# EAGLE board RFMDisplay (EAGLE 6.5.0)
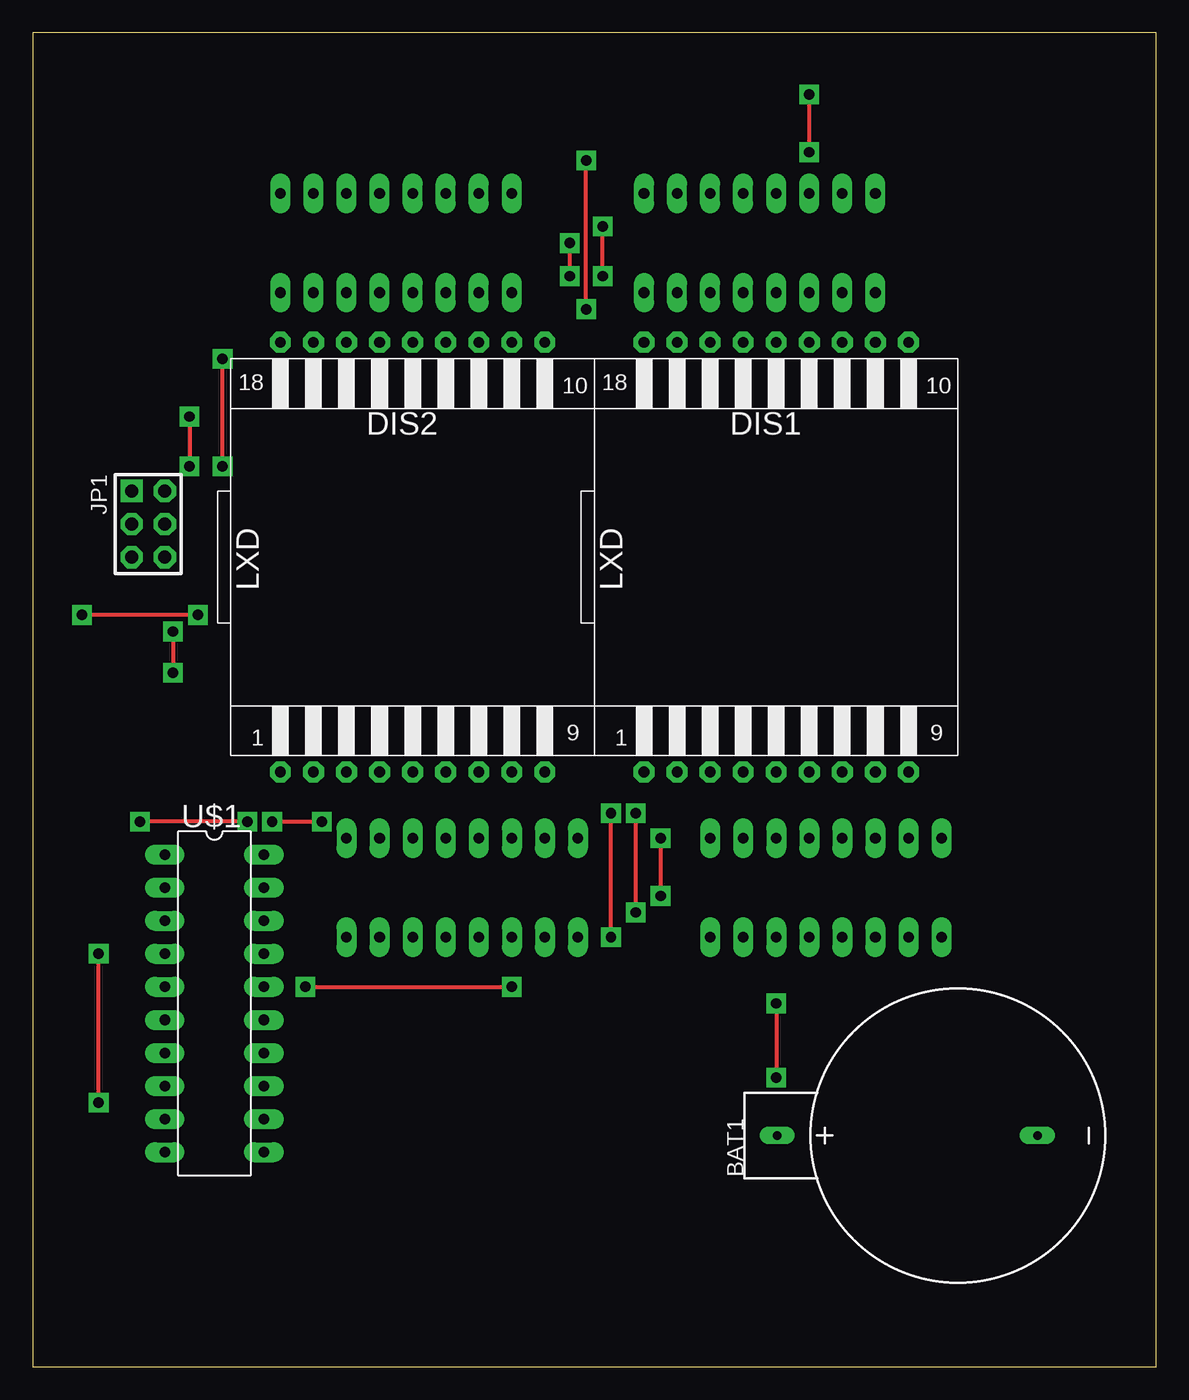
[diagram p0: board, top side]
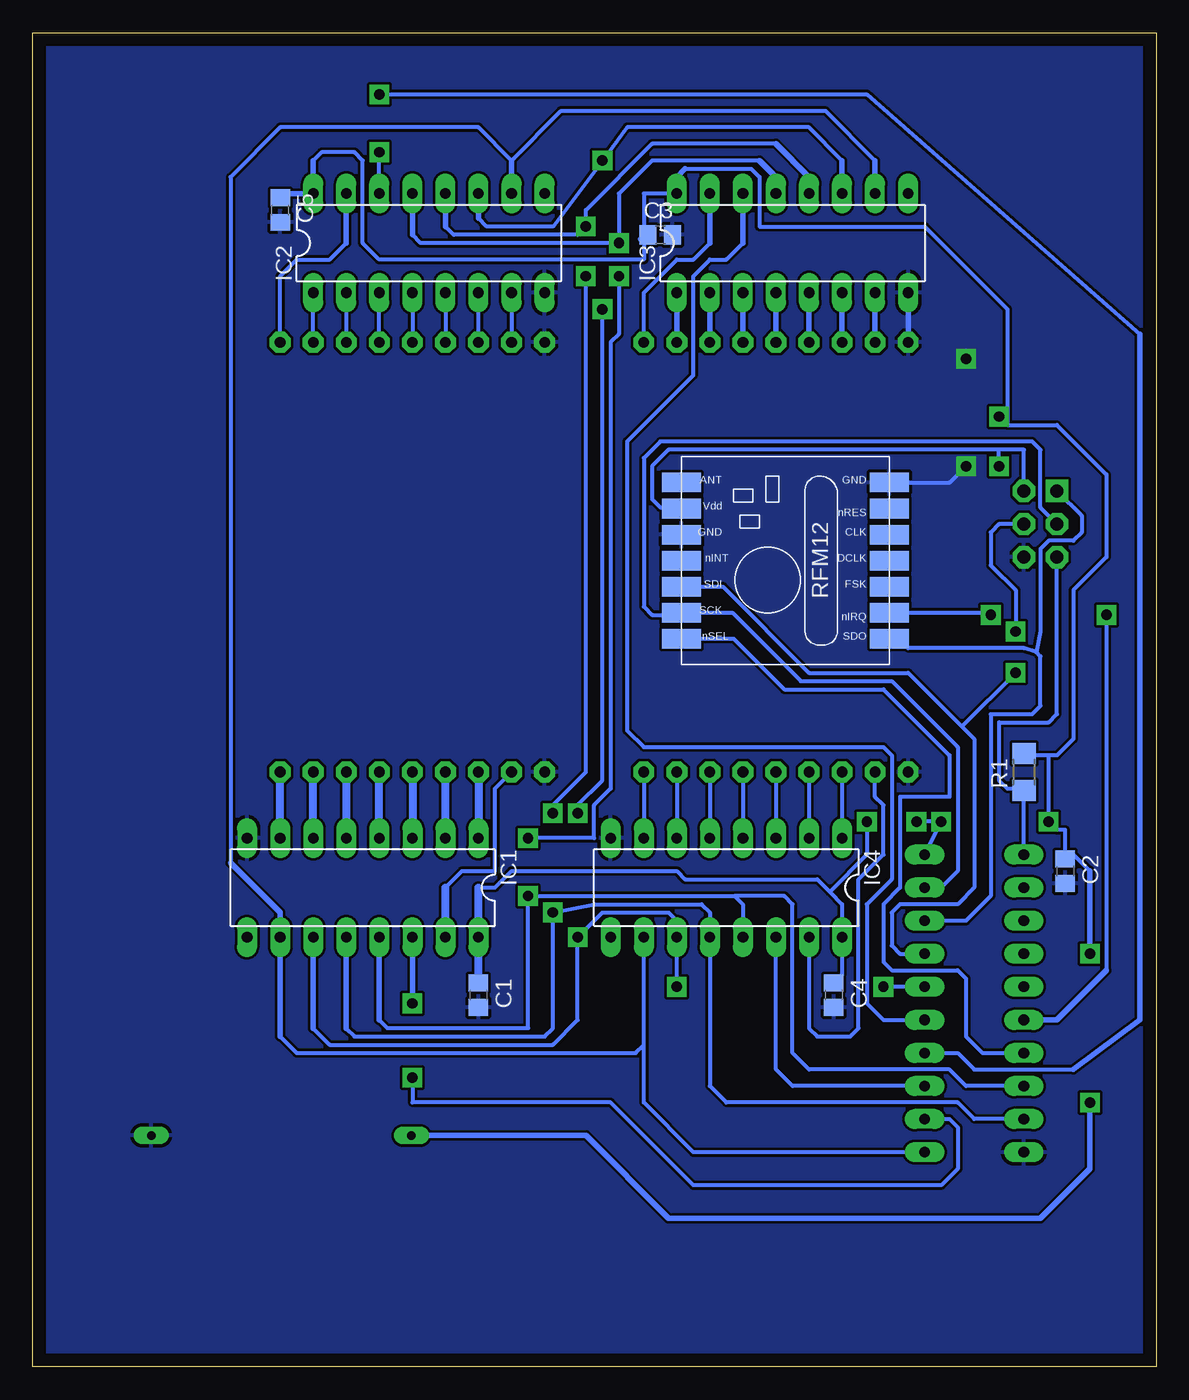
[diagram p1: board, bottom side, seen from below]

Size 86.34 x 102.54 mm. Coordinates in mm from the lower left corner, seen from the top.
Outline: 0,0 86.34,0 86.34,102.54 0,102.54 0,0
Copper layers (1*16): Top 0.035mm / dielectric 1.5mm / Bottom 0.035mm
Design rules "default *": minimum track width 10mil, minimum drill 24mil, track to track 8mil, track to pad 8mil, pad to pad 8mil, via to via 8mil, smd to smd 8mil, copper to edge 40mil, drill to drill 8mil, minimum pad ring 14mil, minimum via ring 14mil, stop-mask expansion 4mil, vias tented up to drill 0mil, thermal gap 10mil

## Footprints (pad centres in the part's own frame; a part is rotated, then mirrored left to right if it is on the bottom)
SN2032 = drill 0.65 long: + 0,13.9; - 0,-6.1
C0805 = smd 1.3 x 1.5: 1 -0.95,0; 2 0.95,0
29-D = drill 0.813 pad 1.6 octagon: 1 -10.16,-16.51; 2 -7.62,-16.51; 3 -5.08,-16.51; 4 -2.54,-16.51; 5 0,-16.51; 6 2.54,-16.51; 7 5.08,-16.51; 8 7.62,-16.51; 9 10.16,-16.51; 10 10.16,16.51; 11 7.62,16.51; 12 5.08,16.51; 13 2.54,16.51; 14 0,16.51; 15 -2.54,16.51; 16 -5.08,16.51; 17 -7.62,16.51; 18 -10.16,16.51
DIL16 = drill 0.813 long: 1 -8.89,-3.81; 2 -6.35,-3.81; 3 -3.81,-3.81; 4 -1.27,-3.81; 5 1.27,-3.81; 6 3.81,-3.81; 7 6.35,-3.81; 8 8.89,-3.81; 9 8.89,3.81; 10 6.35,3.81; 11 3.81,3.81; 12 1.27,3.81; 13 -1.27,3.81; 14 -3.81,3.81; 15 -6.35,3.81; 16 -8.89,3.81
AVR-ISP-6 = drill 1.016 square: 1 -2.54,-1.27 | drill 1.016 octagon: 2 -2.54,1.27; 3 0,-1.27; 4 0,1.27; 5 2.54,-1.27; 6 2.54,1.27
R1206 = smd 1.6 x 1.803: 1 -1.422,0; 2 1.422,0
DIL20 = drill 0.813 long: 1 -11.43,-3.81; 2 -8.89,-3.81; 3 -6.35,-3.81; 4 -3.81,-3.81; 5 -1.27,-3.81; 6 1.27,-3.81; 7 3.81,-3.81; 8 6.35,-3.81; 9 8.89,-3.81; 10 11.43,-3.81; 11 11.43,3.81; 12 8.89,3.81; 13 6.35,3.81; 14 3.81,3.81; 15 1.27,3.81; 16 -1.27,3.81; 17 -3.81,3.81; 18 -6.35,3.81; 19 -8.89,3.81; 20 -11.43,3.81
RFM12 = smd 1.5 x 3: 1 -5,-10; 2 -3,-10; 3 -1,-10; 4 1,-10; 5 3,-10; 6 5,-10; 7 7,-10; 8 7,6; 9 5,6; 10 3,6; 11 1,6; 12 -1,6; 13 -3,6; 14 -5,6

## Placement (x,y rotation side)
BAT1  [SN2032]  71.12,17.78 90 top
C1  [C0805]  52.07,28.57 270 bottom
C2  [C0805]  6.99,38.1 270 bottom
C3  [C0805]  38.1,87 0 bottom
C4  [C0805]  24.77,28.57 270 bottom
C5  [C0805]  67.31,88.9 270 bottom
DIS1  [29-D]  57.15,62.23 0 top
DIS2  [29-D]  29.21,62.23 0 top
IC1  74HCT595N  [DIL16]  60.96,36.83 180 bottom
IC2  74HCT595N  [DIL16]  55.88,86.36 0 bottom
IC3  74HCT595N  [DIL16]  27.94,86.36 0 bottom
IC4  74HCT595N  [DIL16]  33.02,36.83 180 bottom
JP1  AVR-ISP-6VERT  [AVR-ISP-6]  8.89,64.77 270 top
R1  10k  [R1206]  10.16,45.72 90 bottom
U$1  TINY2313-*P*  [DIL20]  13.97,27.94 270 top
U$2  RFM12_SMDSMD  [RFM12]  30.48,60.96 90 bottom

## Library data of the parts
BAT1 = sn2032
C1-C5 R1 = rcl
DIS1 DIS2 = DE112
IC1-IC4 = 74xx-eu
JP1 U$1 = avr-7
U$2 = rfm_12

## Nets
DATA1: IC1.14 U$1.12
DATA2: IC4.14 U$1.13
DATA3: IC2.14 U$1.14
DATA4: IC3.14 U$1.15
GND: BAT1.- C1.2 C2.2 C3.2 C4.2 C5.2 DIS1.1 DIS1.18 DIS2.1 DIS2.18 IC1.8 IC2.8 IC3.8 IC4.8 JP1.6 U$1.10 U$2.7 U$2.10
INT: U$1.6 U$2.2
MISO: JP1.1 U$1.18 U$2.1
MOSI: JP1.4 U$1.17 U$2.12
N$1: DIS1.2 IC1.15
N$2: DIS1.3 IC1.1
N$3: DIS1.4 IC1.2
N$4: DIS1.5 IC1.3
N$5: DIS1.6 IC1.4
N$6: DIS1.7 IC1.5
N$7: DIS1.8 IC1.6
N$8: DIS1.9 IC1.7
N$9: DIS1.10 IC2.15
N$10: DIS1.11 IC2.1
N$11: DIS1.12 IC2.2
N$12: DIS1.13 IC2.3
N$13: DIS1.14 IC2.4
N$14: DIS1.15 IC2.5
N$15: DIS1.16 IC2.6
N$16: DIS1.17 IC2.7
N$17: DIS2.10 IC3.15
N$18: DIS2.11 IC3.1
N$19: DIS2.12 IC3.2
N$20: DIS2.13 IC3.3
N$21: DIS2.14 IC3.4
N$22: DIS2.15 IC3.5
N$23: DIS2.16 IC3.6
N$24: DIS2.17 IC3.7
N$25: DIS2.2 IC4.15
N$26: DIS2.3 IC4.1
N$27: DIS2.4 IC4.2
N$28: DIS2.5 IC4.3
N$29: DIS2.6 IC4.4
N$30: DIS2.7 IC4.5
N$31: DIS2.8 IC4.6
N$32: DIS2.9 IC4.7
RESET: JP1.5 R1.1 U$1.1
SCK: JP1.3 U$1.19 U$2.13
SEL: U$1.7 U$2.14
SR_OE: IC1.13 IC2.13 IC3.13 IC4.13 U$1.8
SR_RCK: IC1.12 IC2.12 IC3.12 IC4.12 U$1.9
SR_SCK: IC1.11 IC2.11 IC3.11 IC4.11 U$1.16
SR_SCL: IC1.10 IC2.10 IC3.10 IC4.10 U$1.11
VCC: BAT1.+ C1.1 C2.1 C3.1 C4.1 C5.1 IC1.16 IC2.16 IC3.16 IC4.16 JP1.2 R1.2 U$1.20 U$2.9

## Tracks (layer width: path | path; a pad name or v marks a point on that pad's centre or on a via)
DATA1  (via drill 0.8 pad 1.02)
  Top 0.305: v57.15,27.94 v57.15,22.23
  Bottom 0.305: U$1.12 15.88,19.05 15.24,18.41 15.24,15.24 16.51,13.97 35.56,13.97 41.91,20.32 57.15,20.32 v57.15,22.23
  Bottom 0.406: IC1.14 v57.15,27.94
DATA2
  Bottom 0.305: U$1.13 27.94,21.59 29.21,22.86 IC4.14
DATA3  (via drill 0.8 pad 1.02)
  Top 0.305: v59.69,93.34 v59.69,97.79
  Bottom 0.305: IC2.14 v59.69,93.34 | v59.69,97.79 22.23,97.79 1.27,79.38 | U$1.14 15.24,24.13 13.97,22.86 6.35,22.86
  Bottom 0.406: 6.35,22.86 1.27,26.67 1.27,79.38
DATA4
  Bottom 0.305: U$1.15 20.95,26.67 22.23,27.94 22.23,35.56 20.32,37.47 20.32,46.99 20.95,47.62 39.37,47.62 40.64,48.9 40.64,71.12 35.56,76.2 35.56,83.82 34.29,85.09 33.02,85.09 31.75,86.36
  Bottom 0.406: IC3.14 31.75,86.36
GND  (via drill 0.8 pad 1.02)
  Top 0.305: v14.61,69.22 v14.61,77.47
  Bottom 0.305: U$2.7 15.86,67.96 v14.61,69.22 | v14.61,77.47 14.61,78.11
  Bottom 0.406: IC3.8 DIS2.18
  pour Bottom: -6.35,102.87 90.17,102.87 92.71,-8.89 -2.54,-7.62
INT  (via drill 0.8 pad 1.02)
  Top 0.305: v12.7,57.78 v3.81,57.78
  Bottom 0.305: U$2.2 12.88,57.96 v12.7,57.78 | v3.81,57.78 3.81,30.48
  Bottom 0.406: 3.81,30.48 7.62,26.67 U$1.6
MISO
  Bottom 0.305: U$2.1 19.77,55.96 19.05,55.24 10.16,55.24 9.21,54.93 | U$1.18 14.61,34.29 12.7,36.2 12.7,50.16 9.53,50.16 8.89,50.8 8.89,54.61 9.21,54.93 | 9.21,54.93 8.89,56.52 8.89,62.87 8.26,63.5 6.35,63.5 5.71,64.14 5.71,65.41 JP1.1
MOSI  (via drill 0.8 pad 1.02)
  Top 0.305: v10.79,56.52 v10.79,53.34
  Bottom 0.305: U$2.12 33.29,59.96 26.67,53.34 19.05,53.34 14.92,49.21 | 14.92,49.21 13.97,48.26 13.97,36.83 15.24,35.56 19.68,35.56 20.32,34.92 20.32,32.38 19.68,31.75 U$1.17 | JP1.4 12.06,64.77 12.7,64.14 12.7,61.59 10.79,59.69 v10.79,56.52 | v10.79,53.34 14.92,49.21
N$1
  Bottom 0.305: 54.61,36.83 53.34,38.1 50.8,38.1 50.8,44.45 DIS1.2
  Bottom 0.61: IC1.15 54.61,36.83
N$2
  Bottom 0.61: DIS1.3 IC1.1
N$3
  Bottom 0.61: IC1.2 DIS1.4
N$4
  Bottom 0.61: DIS1.5 IC1.3
N$5
  Bottom 0.61: IC1.4 DIS1.6
N$6
  Bottom 0.61: DIS1.7 IC1.5
N$7
  Bottom 0.61: IC1.6 DIS1.8
N$8
  Bottom 0.61: IC1.7 DIS1.9
N$9
  Bottom 0.305: DIS1.10 67.31,83.82 66.04,85.09 63.5,85.09 62.23,86.36
  Bottom 0.406: 62.23,86.36 IC2.15
N$10
  Bottom 0.305: DIS1.11 IC2.1
N$11
  Bottom 0.305: IC2.2 DIS1.12
N$12
  Bottom 0.305: DIS1.13 IC2.3
N$13
  Bottom 0.305: IC2.4 DIS1.14
N$14
  Bottom 0.305: IC2.5 DIS1.15
N$15
  Bottom 0.305: DIS1.16 IC2.6
N$16
  Bottom 0.305: IC2.7 DIS1.17
N$17
  Bottom 0.305: DIS2.10 39.37,82.55 36.83,85.09 35.56,85.09 34.29,86.36
  Bottom 0.406: 34.29,86.36 IC3.15
N$18
  Bottom 0.406: IC3.1 DIS2.11
N$19
  Bottom 0.406: IC3.2 DIS2.12
N$20
  Bottom 0.406: DIS2.13 IC3.3
N$21
  Bottom 0.406: IC3.4 DIS2.14
N$22
  Bottom 0.406: DIS2.15 IC3.5
N$23
  Bottom 0.406: IC3.6 DIS2.16
N$24
  Bottom 0.406: DIS2.17 IC3.7
N$25
  Bottom 0.305: IC4.15 26.67,26.04 26.04,25.4 23.5,25.4 22.86,26.04 22.86,37.47 20.95,39.37 20.95,43.18 21.59,43.81 DIS2.2
N$26
  Bottom 0.305: DIS2.3 IC4.1
N$27
  Bottom 0.305: DIS2.4 IC4.2
N$28
  Bottom 0.305: DIS2.5 IC4.3
N$29
  Bottom 0.305: DIS2.6 IC4.4
N$30
  Bottom 0.305: DIS2.7 IC4.5
N$31
  Bottom 0.305: DIS2.8 IC4.6
N$32
  Bottom 0.305: DIS2.9 IC4.7
RESET
  Bottom 0.305: U$1.1 R1.1 10.31,44.45 11.43,44.45 12.06,45.09 12.06,49.53 8.26,49.53 7.62,50.16 JP1.5
SCK
  Bottom 0.305: U$1.19 16.51,36.83 15.24,38.1 15.24,47.62 20.32,52.7 27.3,52.7 32.56,57.96 U$2.13 36.66,57.78 38.73,57.78 39.37,58.42 39.37,69.85 38.1,71.12 9.53,71.12 8.89,70.48 8.89,66.04 JP1.3
SEL
  Bottom 0.305: U$2.14 32.47,55.96 28.57,52.07 20.95,52.07 15.88,46.99 15.88,43.81 19.68,43.81 19.68,36.83 20.95,35.56 20.95,31.11 20.32,30.48 15.24,30.48 14.61,29.84 14.61,25.4 13.34,24.13 U$1.7
SR_OE  (via drill 0.8 pad 1.02)
  Top 0.305: v41.27,86.36 v41.27,83.82 | v48.26,40.64 v48.26,36.2
  Bottom 0.305: 30.48,92.71 38.73,92.71 41.27,90.17 v41.27,86.36 56.52,86.36 57.15,87 | 59.69,26.67 59.05,26.04 48.26,26.04 v48.26,36.2 32.38,36.2 | 32.38,36.2 31.75,35.56 IC4.13 | U$1.8 14.61,21.59 15.88,22.86 26.67,22.86 27.94,24.13 27.94,35.56 28.57,36.2 32.38,36.2 | v41.27,83.82 41.27,79.38 41.91,78.74 41.91,44.45 43.18,43.18 43.18,40.64 v48.26,40.64
  Bottom 0.406: IC3.13 29.21,91.44 30.48,92.71 | 57.15,87 IC2.13 | IC1.13 59.69,26.67
SR_RCK  (via drill 0.8 pad 1.02)
  Top 0.305: v46.35,34.92 v46.35,42.55 | v43.81,83.82 v43.81,87.63
  Bottom 0.305: 29.21,93.98 38.73,93.98 43.81,88.9 v43.81,87.63 44.45,87 53.98,87 54.61,87.63 | 62.23,26.04 61.59,25.4 46.99,25.4 46.35,26.04 v46.35,34.92 43.18,35.56 34.92,35.56 34.29,34.92 IC4.12 34.29,21.59 33.02,20.32 15.24,20.32 13.97,19.05 U$1.9 | v46.35,42.55 46.35,43.18 43.81,45.72 v43.81,83.82
  Bottom 0.406: IC3.12 26.67,91.44 29.21,93.98 | 54.61,87.63 IC2.12 | IC1.12 62.23,26.04
SR_SCK  (via drill 0.8 pad 1.02)
  Top 0.305: v20.95,29.21 v36.83,29.21 | v44.45,33.02 v44.45,42.55 | v42.55,81.28 v42.55,92.71
  Bottom 0.305: 24.13,92.71 26.67,95.25 40.64,95.25 v42.55,92.71 46.35,87.63 51.44,87.63 52.07,88.27 | 64.77,26.04 63.5,24.77 46.35,24.77 44.45,26.67 v44.45,33.02 42.55,34.92 37.47,34.92 36.83,34.29 IC4.11 v36.83,29.21 | U$1.16 v20.95,29.21 | v44.45,42.55 44.45,43.18 42.55,45.09 v42.55,81.28
  Bottom 0.406: IC3.11 24.13,92.71 | 52.07,88.27 IC2.11 | IC1.11 64.77,26.04
SR_SCL
  Bottom 0.305: 21.59,92.71 25.4,96.52 45.72,96.52 49.53,92.71 52.07,95.25 67.31,95.25 71.12,91.44 71.12,38.73 | 67.31,25.4 66.04,24.13 40.01,24.13 39.37,24.77 | 39.37,24.77 IC4.10 | U$1.11 35.56,16.51 39.37,20.32 39.37,24.77
  Bottom 0.406: 21.59,92.71 IC3.10 | 67.31,25.4 IC1.10 67.31,34.92 71.12,38.73 | IC2.10 49.53,92.71
VCC  (via drill 0.8 pad 1.02)
  Top 0.305: v16.51,41.91 v8.26,41.91 | v18.41,41.91 v22.23,41.91 | v12.06,73.03 v12.06,69.22 | v5.08,20.32 v5.08,31.75
  Bottom 0.305: IC3.16 39.37,90.17 39.37,86.36 | 39.37,86.36 39.37,85.09 59.69,85.09 60.96,86.36 60.96,92.71 61.59,93.34 64.14,93.34 64.77,92.71 | 52.07,36.83 50.8,36.83 49.53,38.1 36.83,38.1 36.2,37.47 26.04,37.47 25.08,36.51 | 25.08,36.51 24.13,35.56 IC4.16 24.13,30.16 C4.1 | 66.99,90.17 C5.1 | C3.1 39.69,86.68 39.37,86.36 | U$1.20 v16.51,41.91 v18.41,41.91 | 8.26,46.99 v8.26,41.91 7.62,41.27 6.99,41.27 C2.1 6.67,39.37 6.35,39.37 5.08,38.1 | 8.26,46.99 10.01,46.99 R1.2 | v22.23,41.91 22.23,39.37 25.08,36.51 | JP1.2 10.16,70.48 12.06,70.48 | 12.06,70.48 37.47,70.48 38.73,69.22 38.73,66.67 38.1,66.04 36.4,66.04 | 35.56,66.04 36.4,66.04 | 36.4,66.04 U$2.9 | v12.06,69.22 12.06,70.48 | v12.06,73.03 11.43,72.39 | 11.43,72.39 7.62,72.39 3.81,68.58 3.81,62.23 6.35,59.69 6.35,48.26 7.62,46.99 8.26,46.99 | 36.2,92.08 31.11,92.08 30.48,91.44 30.48,87.63 17.78,87.63 11.43,81.28 11.43,72.39
  Bottom 0.406: 64.77,92.71 IC2.16 66.99,90.17 | IC3.16 36.83,91.44 36.2,92.08 | BAT1.+ 43.81,17.78 37.47,11.43 8.89,11.43 5.08,15.24 v5.08,20.32 | v5.08,31.75 5.08,38.1
  Bottom 0.61: 52.07,36.83 IC1.16 C1.1